# Altium PCB LEDArray8KeyBakup.PcbDoc
Units mil, origin at the board's own origin, x right, y up, seen from the top; angles counter-clockwise.
Board outline 6000 x 4000 mil, 2 copper layers (Top Layer, Bottom Layer); 27 components, 80 nets, 209 pads, 92 vias.
Unrouted connection lines stored in the file: 29.
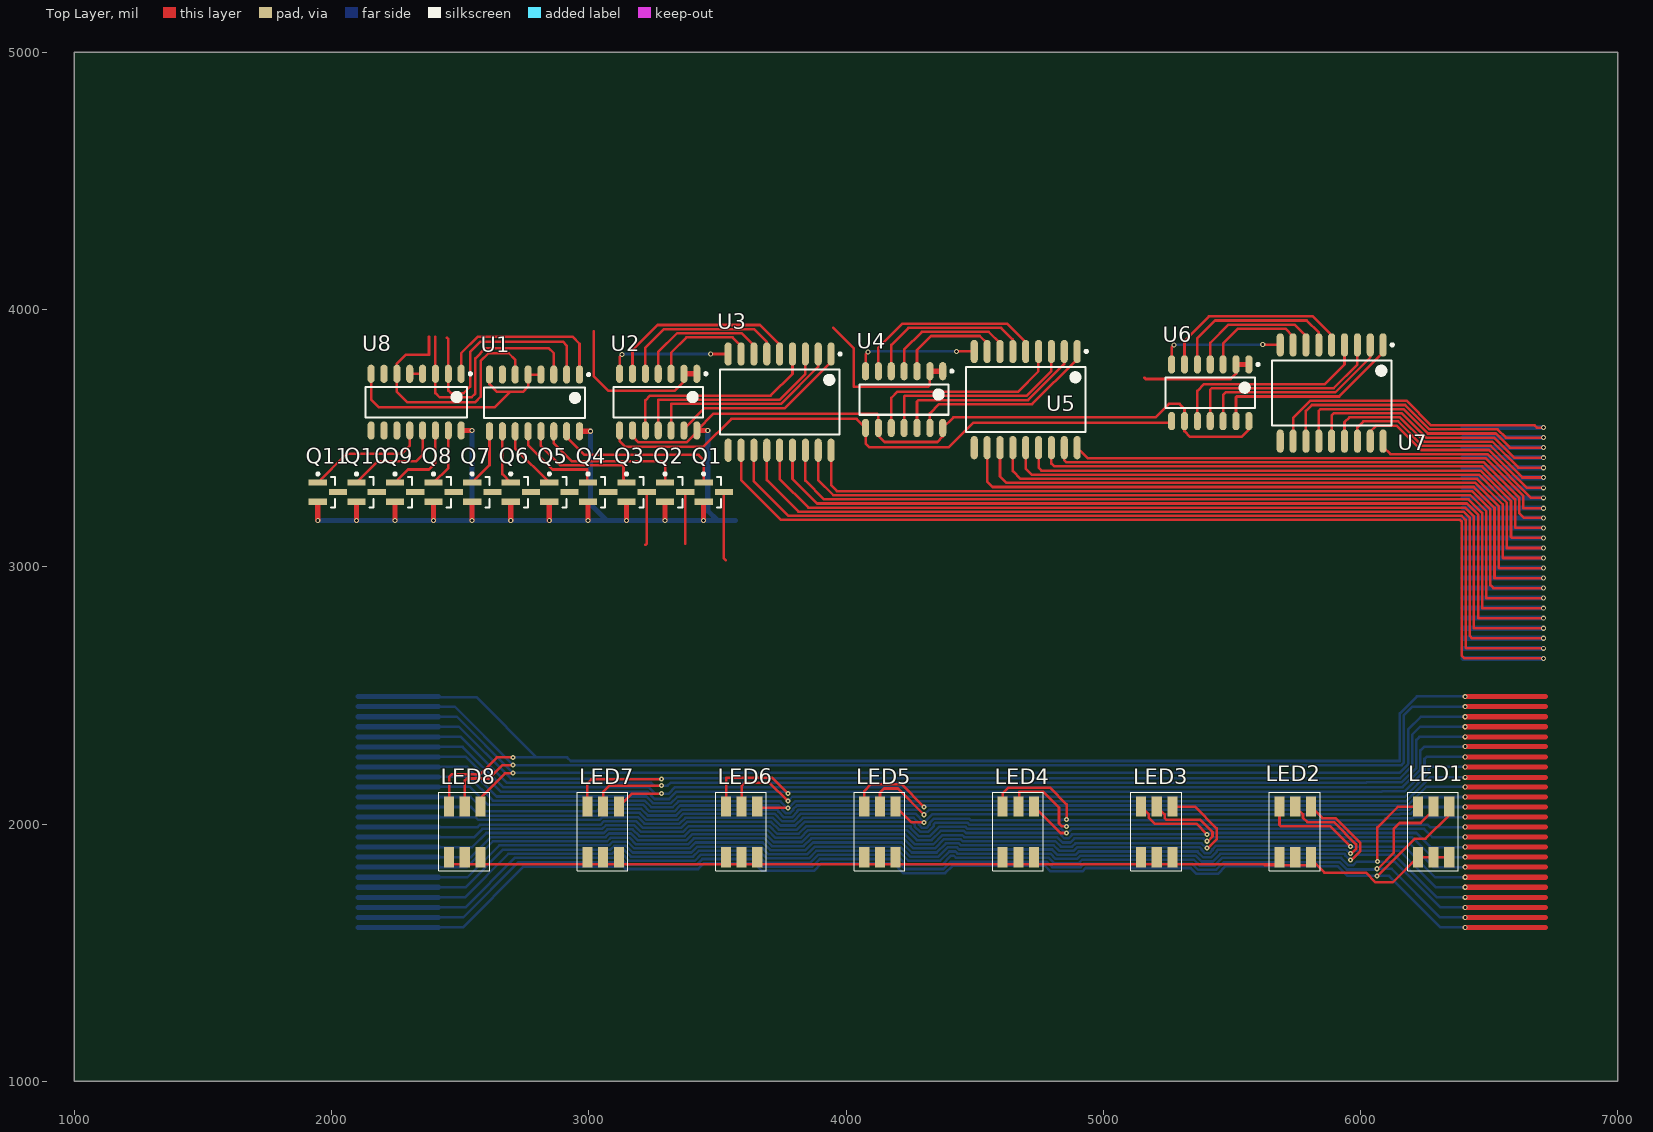
[diagram p0: Top Layer view]
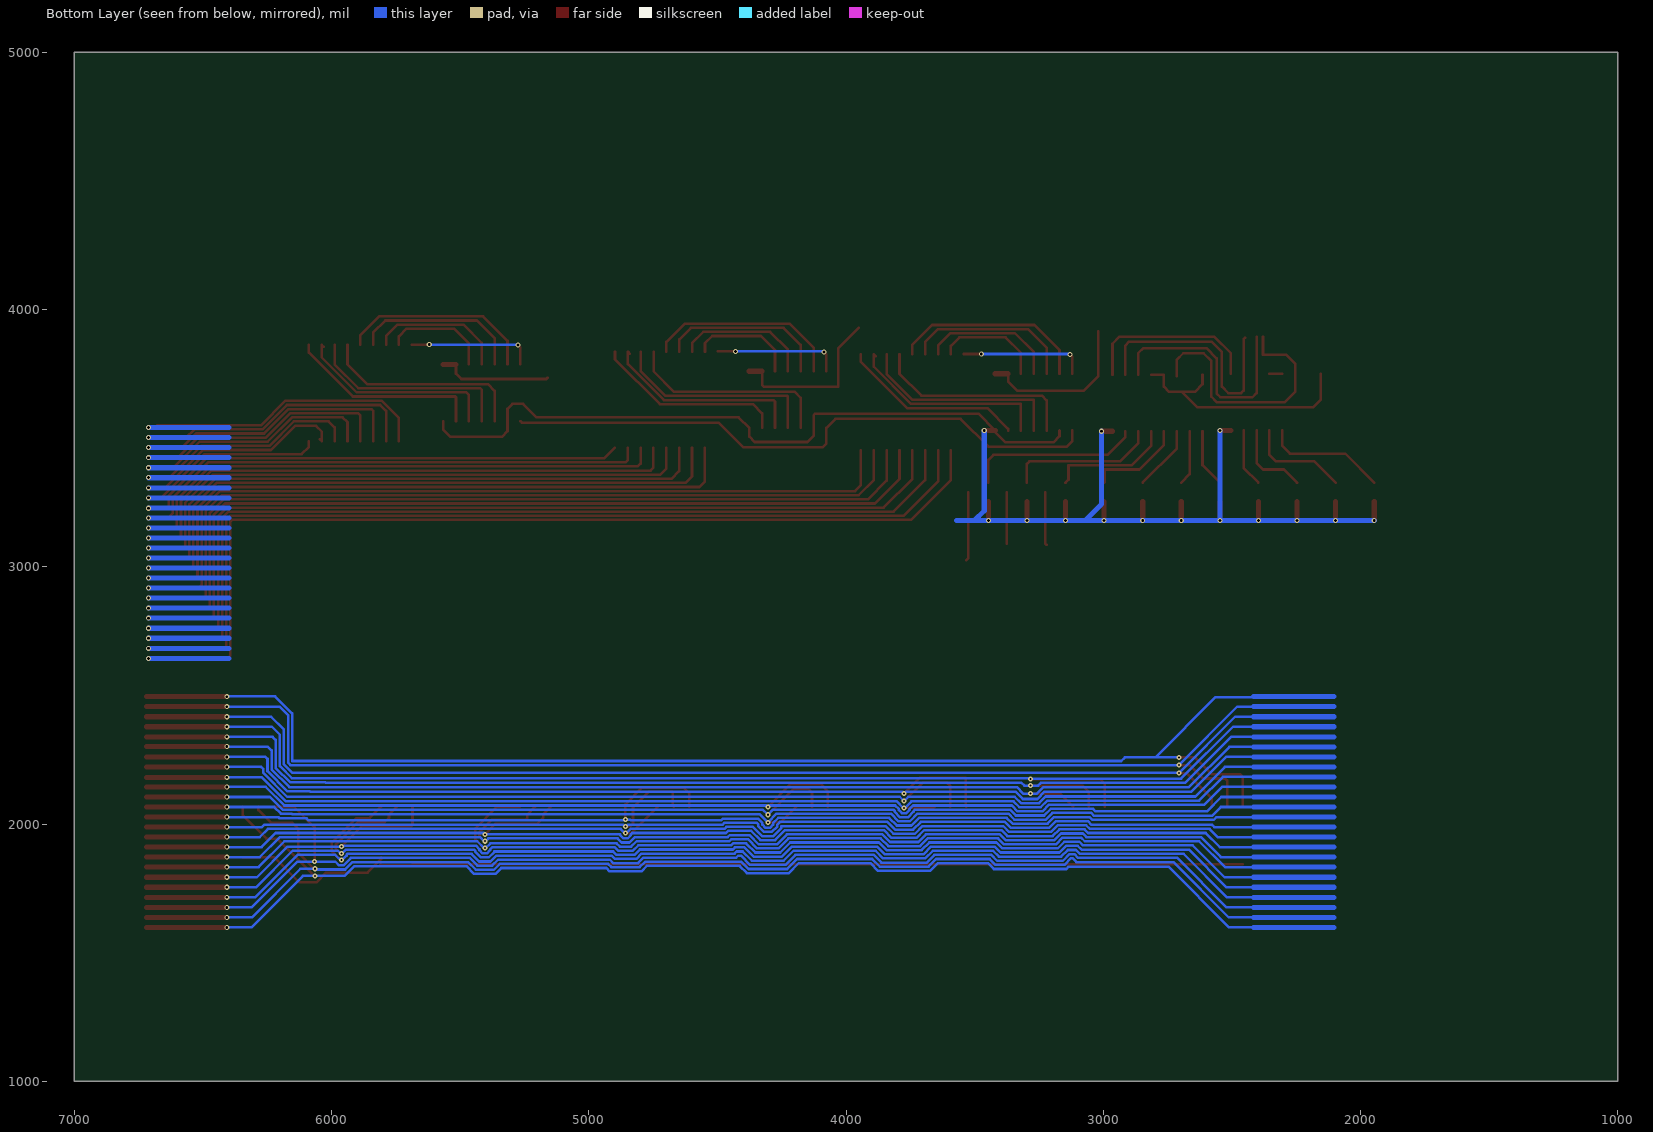
[diagram p1: Bottom Layer view, seen from below]

## Layer stack, top to bottom
Top Layer: signal copper 1.4
Dielectric: prepreg 12.6, FR-4, Dk 4.8
Bottom Layer: signal copper 1.4

## Board outline
1000,1000 7000,1000 7000,5000 1000,5000

## Design rules (kind name [scope] priority, off if disabled: settings)
Clearance [All] p1: gap=6
HoleSize [All] p1: absolutevalues=TRUE maxlimit=7.87 minlimit=7.87 maxpercent=80.000 minpercent=20.000
HoleToHoleClearance [All] p1: gap=3 allowstackedmicrovias=TRUE
MinimumAnnularRing [All] p1: minimumring=4
MinimumSolderMaskSliver [All] p1: minsoldermaskwidth=3.94
PolygonConnect [All] p1: connectstyle=Relief reliefconductorwidth=10 reliefentries=4 polygonreliefangle="90 Angle"
RoutingVias [All] p1: holewidth=11.02 width=19.68 viastyle="Through Hole" minholewidth=7.87 minwidth=19.68 maxholewidth=11.02 maxwidth=19.68
SilkscreenOverComponentPads [All] p1: minsilkscreentomaskgap=10
SolderMaskExpansion [All] p1: expansion=3
Width [All] p1: maxlimit=393.7 minlimit=5 preferedwidth=19.68 minimp=50.000000 maximp=50.000000 favimp=50.000000
24 further rules are at their usual default settings.

## Classes and differential pairs
component class LEDArray: Q1 Q2 Q3 Q4 Q5 Q6 Q7 Q8 Q9 Q10 Q11 U1 U2 U3 U4 U5 U6 U7 U8
component class 1: LED1 LED2 LED3 LED4 LED5 LED6 LED7 LED8

## Components (designator, comment, footprint, x,y, rotation, side; value= is the part's Value field where it differs from the comment)
LED1 "5050RGBLED" "5050 cRGBLED" 6284.34,1969.24 r90 top
LED2 "5050RGBLED" "5050 cRGBLED" 5746.27,1969.24 r90 top
LED3 "5050RGBLED" "5050 cRGBLED" 5208.2,1969.24 r90 top
LED4 "5050RGBLED" "5050 cRGBLED" 4670.13,1969.24 r90 top
LED5 "5050RGBLED" "5050 cRGBLED" 4132.06,1969.24 r90 top
LED6 "5050RGBLED" "5050 cRGBLED" 3593.99,1969.24 r90 top
LED7 "5050RGBLED" "5050 cRGBLED" 3055.92,1969.24 r90 top
LED8 "5050RGBLED" "5050 cRGBLED" 2517.85,1969.24 r90 top
Q1 "BC807" SOT23-3M 3485.99,3290 r0 top
Q2 "BC807" SOT23-3M 3335.99,3290 r0 top (schematic designator Q1)
Q3 "BC807" SOT23-3M 3185.99,3290 r0 top (schematic designator Q1)
Q4 "BC807" SOT23-3M 3035.99,3290 r0 top (schematic designator Q1)
Q5 "BC807" SOT23-3M 2885.99,3290 r0 top (schematic designator Q1)
Q6 "BC807" SOT23-3M 2735.99,3290 r0 top (schematic designator Q1)
Q7 "BC807" SOT23-3M 2585.99,3290 r0 top (schematic designator Q1)
Q8 "BC807" SOT23-3M 2435.99,3290 r0 top (schematic designator Q1)
Q9 "BC807" SOT23-3M 2285.99,3290 r0 top (schematic designator Q1)
Q10 "BC807" SOT23-3M 2135.99,3290 r0 top (schematic designator Q1)
Q11 "BC807" SOT23-3M 1985.99,3290 r0 top (schematic designator Q1)
U1 "SN54HC138M" SOIC127P602-16BM 2789,3637 r270 top
U2 "SN74HC164M" SOIC127P600-14AM 3270.01,3640 r270 top
U3 "ULN2803ADW" SOIC127P1030-18AM 3742,3640 r270 top
U4 "SN74HC164M" SOIC127P600-14AM 4226.01,3650 r270 top
U5 "ULN2803ADW" SOIC127P1030-18AM 4698.6,3650 r270 top
U6 "SN74HC164M" SOIC127P600-14AM 5416.01,3676.49 r270 top
U7 "ULN2803ADW" SOIC127P1030-18AM 5888,3675.49 r270 top
U8 "SN54HC138M" SOIC127P602-16BM 2329,3640 r270 top

## Footprints (in the part's own frame and the unit in brackets; to place one, negate y for a bottom-side part, rotate by r counter-clockwise, add the part's x,y. Pads: shape width x height; smd on the part's side, far side on the other; paste and mask are expansions set on the pad)
"5050 cRGBLED" [mm] "5050 RGBLED"
  rect 2x1 smd: 1(-2.5,1.55) 2(2.5,1.55) 3(-2.5,0) 4(2.5,0) 5(-2.5,-1.55) 6(2.5,-1.55)
  silkscreen extent -3.85,-2.45 3.9,2.55
SOIC127P600-14AM [mm] "SOIC, 14-Leads, Body 8.6x3.9mm, Pitch 1.27mm, IPC Low Density"
  oval 1.8x0.7 smd: 1(-2.8,3.81) 2(-2.8,2.54) 3(-2.8,1.27) 4(-2.8,0) 5(-2.8,-1.27) 6(-2.8,-2.54) 7(-2.8,-3.81) 8(2.8,-3.81) 9(2.8,-2.54) 10(2.8,-1.27) 11(2.8,0) 12(2.8,1.27) 13(2.8,2.54) 14(2.8,3.81)
  silkscreen extent -2.92,-4.4 1.5,4.84, body extent -2,-4.38 2,4.38, height 1.73
SOIC127P602-16BM [mm] "SOIC, 16-Leads, Body 9.9x3.9mm, Pitch 1.27mm, IPC Low Density"
  oval 1.8x0.7 smd: 1(-2.8,4.445) 2(-2.8,3.175) 3(-2.8,1.905) 4(-2.8,0.635) 5(-2.8,-0.635) 6(-2.8,-1.905) 7(-2.8,-3.175) 8(-2.8,-4.445) 9(2.8,-4.445) 10(2.8,-3.175) 11(2.8,-1.905) 12(2.8,-0.635) 13(2.8,0.635) 14(2.8,1.905) 15(2.8,3.175) 16(2.8,4.445)
  silkscreen extent -2.92,-5 1.5,5.47, body extent -2,-5 2,5, height 1.73
SOIC127P1030-18AM [mm] "SOIC, 18-Leads, Body 11.6x7.5mm, Pitch 1.27mm, IPC Low Density"
  oval 2.3x0.7 smd: 1(-4.75,5.08) 2(-4.75,3.81) 3(-4.75,2.54) 4(-4.75,1.27) 5(-4.75,0) 6(-4.75,-1.27) 7(-4.75,-2.54) 8(-4.75,-3.81) 9(-4.75,-5.08) 10(4.75,-5.08) 11(4.75,-3.81) 12(4.75,-2.54) 13(4.75,-1.27) 14(4.75,0) 15(4.75,1.27) 16(4.75,2.54) 17(4.75,3.81) 18(4.75,5.08)
  silkscreen extent -4.87,-5.9 3.2,6.11, body extent -3.8,-5.85 3.8,5.85, height 2.65
SOT23-3M [mm] "SOT23, 3-Leads, Body 2.9x1.3mm, Pitch 0.95mm, Lead Span 2.5mm, IPC Low Density"
  rect 1.8x0.6 smd: 1(-1,0.95) 2(-1,-0.95) 3(1,0)
  silkscreen extent -1.12,-1.5 0.7,1.92, body extent -0.7,-1.5 0.7,1.5, height 1.1

## Part data
LED1 LED2 LED3 LED4 LED5 LED6 LED7 LED8: "5050 RGB LED"
Q1 Q2 Q3 Q4 Q5 Q6 Q7 Q8 Q9 Q10 Q11: "PNP General Purpose Amplifier"
U1 U8: library part SN54HC138J, "3-Line to 8-Line Decoder / Demultiplexer"
U2 U4 U6: "8-Bit Parallel-Out Serial Shift Register"
U3 U5 U7: library part ULN2803A, "High-Voltage, High-Current Darlington Array"

## Via types
v1: diameter 19.68, hole 11.02, Top Layer to Bottom Layer, 68 vias
v2: diameter 19.68, hole 7.87, Top Layer to Bottom Layer, 24 vias

## Nets (pads, with @x,y where several pads share a name; then routed paths per layer and width w, separated by ;. In a path a pad name is that pad's centre, name@x,y a point inside that pad or via, vN(x,y) a via of type N, cw(c..) or ccw(c..) an arc to the next point about the centre after c; other vN are vias at no path point)
A: U1.1 U8.1 | length 698
  Top Layer w10: U8.1 2504,3830 2569,3895 2936,3895 2964,3867 U1.1
B: U1.2 U8.2 | length 952.1
  Top Layer w10: 2449,3890 2454,3885 U8.2 2454,3685 2464,3675 2514,3675 2539,3700 2539,3835 2579,3875 2899,3875 2914,3860 U1.2
C: U1.3 U8.3 | length 936.5
  Top Layer w10: 2404,3895 U8.3 2404,3675 2420,3659 2544,3659 2559,3674 2559,3810 2599,3850 2844,3850 2864,3830 U1.3
CLK: U2.8 U4.8 U6.8 | length 2363.4
  Top Layer w10: U2.8 3120.01,3488.99 3141.67,3467.33 3446.33,3467.33 3554,3575 4040.77,3575 U4.8 4076.01,3478.99 4090,3465 4400,3465 4495,3560 5259.75,3560 U6.8
COM1: LED1.1 LED1.3 LED1.5 LED2.1 LED2.3 LED2.5 LED3.1 LED3.3 LED3.5 LED4.1 LED4.3 LED4.5 LED5.1 LED5.3 LED5.5 LED6.1 LED6.3 LED6.5 LED7.1 LED7.3 LED7.5 LED8.1 LED8.3 LED8.5 Q1.3 | length 4307.4
  Top Layer w10: LED8.1@2457.82,1843.82 2578.87,1843.82 3532.96,1843.82 4193.08,1843.82 4670.13,1843.82 5147.18,1843.82 5624.02,1843.82 ; Q1.3 3525.36,3032.6 3532.96,3025 ; LED2.1@5686.25,1843.82 5624.02,1843.82 ; LED2.5@5807.29,1839.16 5628.68,1839.16 5624.02,1843.82 ; LED2.5 5807.29,1863.72 5860.02,1811 6021.02,1811 6059.02,1773 6125.5,1773 LED1.1 LED1.3 LED1.5 ; LED2.5@5808.29,1843.82 LED2.5@5809.96,1842.16
COM2: Q2.3 | length 200.2
  Top Layer w10: 3375,3090 3375.36,3090.36 Q2.3
COM3: Q3.3 | length 207.2
  Top Layer w10: 3220,3085 3225.36,3090.36 Q3.3
COM4: Q4.3
COM5: Q5.3
COM6: Q6.3
COM7: Q7.3
COM8: Q8.3
COM9: Q9.3
COM10: Q10.3
COM11: Q11.3
D: U1.6 U8.6 | length 1031
  Top Layer w10: 2379,3895 2379,3825 2289,3825 2254,3790 U8.6 2254,3680 2294,3640 2559,3640 2580,3661 2580,3800 2610,3830 2689,3830 2714,3805 U1.6 U1.6@2714,3740.54
GND: U1.4 U1.5 U1.8 U2.7 U3.9 U4.7 U5.9 U6.7 U7.9 U8.4 U8.5 U8.8 | length 2511.5
  Top Layer w10: U8.8 2154,3650 2184,3620 2634,3620 2694,3680 ; U8.5 U8.4 ; U1.8 2614,3710 2644,3680 2694,3680 ; U1.4 U1.5 2764,3700 2744,3680 2694,3680 ; U2.7 3120.01,3816.01 v1(3129,3825) ; v1(3474,3827.01) U3.9@3542.6,3827.01 ; U4.7 4076.01,3826.01 v1(4085,3835) ; v1(4430,3837.01) U5.9 ; U6.7 5266.01,3852.5 v1(5275,3861.49) ; v1(5620,3863.5) U7.9@5688.6,3863.5
  Bottom Layer w10: v1(3129,3825) 3131.01,3827.01 v1(3474,3827.01) ; v1(4085,3835) 4087.01,3837.01 v1(4430,3837.01) ; v1(5275,3861.49) 5277.01,3863.5 v1(5620,3863.5)
I1: U2.1 U2.2 | length 642.3
  Top Layer w10: 3020,3915 3020,3740.36 3075.36,3685 3335,3685 3370.01,3720.01 U2.2
  Top Layer w20: U2.2 U2.1
I2: U4.1 U4.2 | length 664.4
  Top Layer w10: 3951,3929 4030,3850 4030,3700 4320,3700 4326.01,3706.01 U4.2
  Top Layer w20: U4.2 U4.1
I3: U6.1 U6.2 | length 452.5
  Top Layer w10: 5160,3735 5165,3730 5495,3730 5516.01,3751.01 U6.2
  Top Layer w20: U6.2 U6.1
L1: LED1.6 U3.18 | length 9149.6
  Top Layer w10: U3.18 3942,3317 3965,3294 6433.53,3294 6505.14,3222.39 6505.14,2929 6517.14,2917 v1(6711,2917) ; v2(6065.02,1798) 6066.49,1798 6211.49,1943 6253.02,1943 6345.37,2035.35 LED1.6
  Top Layer w19.68: v1(6407.02,1598) 6719.78,1598
  Bottom Layer w10: 2279.34,1598 2415.21,1598 2511.02,1598 2747.02,1834 3134.83,1834 3143.67,1825.16 3425.47,1825.16 3448.31,1848 3642.76,1848 3672.6,1818.16 3875.44,1818.16 3905.28,1848 4183.64,1848 4222.48,1809.16 4385.55,1809.16 4413.4,1837 4774.52,1837 4795.37,1816.16 4918.67,1816.16 4931.51,1829 5339.41,1829 5362.25,1806.16 5445.79,1806.16 5475.63,1836 5911.29,1836 5949.29,1798 v2(6065.02,1798) 6111.02,1798 6311.02,1598 v1(6407.02,1598) ; 6578.42,2917 v1(6711,2917)
  Bottom Layer w19.68: 2102.45,1598 2415.21,1598 ; 6398.25,2917 v1(6711,2917)
L2: LED1.4 U3.17 | length 9378.8
  Top Layer w10: U3.17 3892,3337 3951,3278 6426.9,3278 6489.14,3215.76 6489.14,2878 v1(6711,2878) ; v2(6065.02,1826) 6067.49,1826 6129.02,1887.52 6129.02,1981 6152.02,2004 6234.26,2004 6284.34,2054.08 LED1.4
  Top Layer w19.68: v1(6407.02,1637) 6719.78,1637
  Bottom Layer w10: 2102.45,1637 2415.21,1637 2512.02,1637 2727.02,1852 3104,1852 3119,1867 3124.45,1867 3150.3,1841.16 3418.84,1841.16 3441.68,1864 3649.39,1864 3679.23,1834.16 3868.81,1834.16 3898.65,1864 4190.27,1864 4229.11,1825.16 4378.93,1825.16 4406.77,1853 4781.15,1853 4801.99,1832.16 4912.04,1832.16 4924.89,1845 5346.03,1845 5368.88,1822.16 5439.16,1822.16 5469,1852 5917.92,1852 5946.76,1823.16 6062.18,1823.16 v2(6065.02,1826) 6121.02,1826 6310.02,1637 v1(6407.02,1637) ; 6575.14,2878 v1(6711,2878)
  Bottom Layer w19.68: 2102.45,1637 2415.21,1637 ; 6398.25,2878 v1(6711,2878)
L3: LED1.2 U3.16 | length 9581.1
  Top Layer w10: U3.16 3842,3335 3915,3262 6420.27,3262 6473.14,3209.14 6473.14,2839 v1(6711,2839) ; v2(6066.02,1854) 6066.02,1987 6146.02,2067 6222.65,2067 LED1.2
  Top Layer w19.68: v1(6407.02,1676) 6719.78,1676
  Bottom Layer w10: 2102.45,1676 2415.21,1676 2520.02,1676 2712.02,1868 3097.37,1868 3112.37,1883 3131.08,1883 3156.92,1857.16 3412.22,1857.16 3435.06,1880 3656.01,1880 3685.86,1850.16 3862.18,1850.16 3892.02,1880 4196.9,1880 4235.74,1841.16 4372.3,1841.16 4408.14,1877 4418.65,1877 4426.65,1869 4787.78,1869 4808.62,1848.16 4905.42,1848.16 4918.26,1861 5352.66,1861 5375.5,1838.16 5432.53,1838.16 5462.38,1868 5924.54,1868 5953.39,1839.16 5970.65,1839.16 5985.49,1854 v2(6066.02,1854) 6133.02,1854 6311.02,1676 v1(6407.02,1676) ; 6398.25,2839 v1(6711,2839)
  Bottom Layer w19.68: 2102.45,1676 2415.21,1676 ; 6398.25,2839 v1(6711,2839)
L4: LED2.6 U3.15 | length 9659.8
  Top Layer w10: U3.15 3792,3342 3888,3246 6413.65,3246 6457.14,3202.51 6457.14,2800 v1(6711,2800) ; LED2.6 5851.96,2023 5903.12,2023 5998.86,1927.26 5998.86,1893.37 5965.49,1860 v2(5962.02,1860)
  Top Layer w19.68: v1(6407.02,1715) 6719.78,1715
  Bottom Layer w10: 2102.45,1715 2415.21,1715 2518.02,1715 2687.02,1884 3090.75,1884 3105.75,1899 3137.71,1899 3163.55,1873.16 3405.59,1873.16 3428.43,1896 3662.64,1896 3692.48,1866.16 3855.55,1866.16 3885.4,1896 4203.52,1896 4242.37,1857.16 4365.67,1857.16 4401.51,1893 4425.28,1893 4433.28,1885 4794.41,1885 4815.25,1864.16 4898.79,1864.16 4911.63,1877 5359.29,1877 5382.13,1854.16 5425.91,1854.16 5455.75,1884 5937.92,1884 5941.18,1880.74 5941.18,1877.37 5958.54,1860 v2(5962.02,1860) 5965.49,1860 5985.49,1880 6132.02,1880 6297.02,1715 v1(6407.02,1715) ; 6398.25,2800 v1(6711,2800)
  Bottom Layer w19.68: 2102.45,1715 2415.21,1715 ; 6398.25,2800 v1(6711,2800)
L5: LED2.4 U3.14 | length 9734.8
  Top Layer w10: U3.14 3742,3342 3854,3230 6407.02,3230 6441.14,3195.88 6441.14,2761 v1(6711,2761) ; LED2.4 5776.61,2037.33 5776.61,2023.74 5793.35,2007 5896.49,2007 5982.86,1920.63 5982.86,1903.37 5965.49,1886 v2(5962.02,1886)
  Top Layer w19.68: v1(6407.02,1754) 6719.78,1754
  Bottom Layer w10: 2102.45,1754 2415.21,1754 2521.02,1754 2667.02,1900 3084.12,1900 3099.12,1915 3144.34,1915 3170.18,1889.16 3398.96,1889.16 3421.8,1912 3669.27,1912 3699.11,1882.16 3848.93,1882.16 3878.77,1912 4210.15,1912 4248.99,1873.16 4359.04,1873.16 4394.89,1909 4431.91,1909 4439.91,1901 4801.03,1901 4821.88,1880.16 4892.16,1880.16 4905,1893 5367.18,1893 5367.18,1891.74 5388.76,1870.16 5419.28,1870.16 5440.86,1891.74 5440.86,1895.11 5445.75,1900 5944.54,1900 5958.54,1886 v2(5962.02,1886) 5965.49,1886 5975.49,1896 6151.02,1896 6293.02,1754 v1(6407.02,1754) ; 6398.25,2761 v1(6711,2761)
  Bottom Layer w19.68: 2102.45,1754 2415.21,1754 ; 6398.25,2761 v1(6711,2761)
L6: LED2.2 U3.13 | length 9823.5
  Top Layer w10: U3.13 3692,3337 3815,3214 6400.39,3214 6425.14,3189.25 6425.14,2731 6434.14,2722 v1(6711,2722) ; LED2.2 5685.25,1996.77 5691.02,1991 5883.02,1991 v2(5962.02,1912)
  Top Layer w19.68: v1(6407.02,1793) 6719.78,1793
  Bottom Layer w10: 2102.45,1793 2415.21,1793 2528.02,1793 2652.02,1917 3078.49,1917 3092.49,1931 3150.96,1931 3176.81,1905.16 3392.33,1905.16 3415.18,1928 3675.9,1928 3705.74,1898.16 3842.3,1898.16 3872.14,1928 4216.78,1928 4255.62,1889.16 4352.42,1889.16 4388.26,1925 4438.53,1925 4446.53,1917 4807.66,1917 4828.5,1896.16 4885.53,1896.16 4898.38,1909 5375.92,1909 5383.18,1901.74 5383.18,1898.37 5395.39,1886.16 5412.65,1886.16 5424.86,1898.37 5424.86,1901.74 5439.12,1916 5951.17,1916 5955.17,1912 v2(5962.02,1912) 6171.02,1912 6290.02,1793 v1(6407.02,1793) ; 6398.25,2722 v1(6711,2722)
  Bottom Layer w19.68: 2102.45,1793 2415.21,1793 ; 6398.25,2722 v1(6711,2722)
L7: LED3.6 U3.12 | length 9625.1
  Top Layer w10: U3.12 3642,3332 3776,3198 6393.76,3198 6409.14,3182.63 6409.14,2686 ; LED3.6 5356.35,2067.67 5440.86,1983.16 5440.86,1940.37 5407.49,1907 v2(5404.02,1907) ; 6412.14,2683 v1(6711,2683)
  Top Layer w19.68: v1(6407.02,1832) 6719.78,1832
  Bottom Layer w10: 2279.34,1832 2415.21,1832 2526.02,1832 2627.02,1933 3071.86,1933 3085.86,1947 3157.59,1947 3183.43,1921.16 3385.71,1921.16 3408.55,1944 3682.52,1944 3712.37,1914.16 3835.67,1914.16 3865.51,1944 4223.41,1944 4262.25,1905.16 4345.79,1905.16 4381.63,1941 4445.16,1941 4453.16,1933 4814.29,1933 4835.13,1912.16 4878.91,1912.16 4891.75,1925 5382.54,1925 5400.54,1907 v2(5404.02,1907) 5407.49,1907 5433.49,1933 6183.02,1933 6284.02,1832 v1(6407.02,1832) ; 6398.25,2683 v1(6711,2683)
  Bottom Layer w19.68: 2102.45,1832 2415.21,1832 ; 6398.25,2683 v1(6711,2683)
L8: LED3.4 U3.11 | length 9513.6
  Top Layer w10: U3.11 3592,3337 3747,3182 6387.14,3182 6393.14,3176 6393.14,2678.11 ; LED3.4 5238.54,2037.33 5238.54,2023.74 5244.98,2017.3 5376.72,2017.3 5376.72,2016.78 5424.86,1968.63 5424.86,1951.37 5406.49,1933 v2(5404.02,1933) ; 6393.09,2678.11 6393.09,2654.68 6403.76,2644 v1(6711,2644)
  Top Layer w19.68: v1(6407.02,1871) 6719.78,1871
  Bottom Layer w10: 2282.63,1871 2415.21,1871 2542.39,1871 2620.39,1949 3065.24,1949 3079.24,1963 3164.22,1963 3190.06,1937.16 3379.08,1937.16 3401.92,1960 3689.15,1960 3718.99,1930.16 3829.04,1930.16 3858.89,1960 4230.03,1960 4268.88,1921.16 4339.16,1921.16 4375,1957 4451.79,1957 4459.79,1949 4820.92,1949 4841.76,1928.16 4872.28,1928.16 4888.12,1944 5390.54,1944 5401.54,1933 v2(5404.02,1933) 5406.49,1933 5422.49,1949 6201.02,1949 6279.02,1871 v1(6407.02,1871) ; 6575.14,2644 v1(6711,2644)
  Bottom Layer w19.68: 2102.45,1871 2415.21,1871 ; 6398.25,2644 v1(6711,2644)
L9: LED3.2 U5.18 | length 7954.7
  Top Layer w10: U5.18 4939.59,3422 6486.55,3422 6633.14,3275.41 6633.14,3227.49 v1(6711,3227.49) ; LED3.2 5177.51,2037.33 5177.51,2023.74 5199.96,2001.3 5362.72,2001.3 v2(5404.02,1960)
  Top Layer w19.68: v1(6407.02,1910) 6719.78,1910
  Bottom Layer w10: 2102.45,1910 2415.21,1910 2547.02,1910 2602.02,1965 3058.61,1965 3072.61,1979 3170.85,1979 3196.69,1953.16 3372.45,1953.16 3395.29,1976 3695.78,1976 3725.62,1946.16 3822.42,1946.16 3852.26,1976 4236.66,1976 4275.5,1937.16 4332.53,1937.16 4368.38,1973 4458.42,1973 4466.42,1965 4830.92,1965 4836.18,1959.74 4836.18,1956.37 4848.39,1944.16 4865.65,1944.16 4877.86,1956.37 4877.86,1959.74 4878.12,1960 v2(5404.02,1960) 5409.02,1965 6217.02,1965 6272.02,1910 v1(6407.02,1910) ; 6398.25,3229 v1@6711,3229
  Bottom Layer w19.68: 2102.45,1910 2415.21,1910 ; 6398.25,3229 v1@6711,3229
L10: LED4.6 U5.17 | length 7892
  Top Layer w10: LED4.6 4833.82,1965 v2(4857.02,1965) ; U5.17 4848.6,3413.92 4856.52,3406 6479.92,3406 6617.14,3268.78 6617.14,3208.98 6636.11,3190 v1(6711,3190)
  Top Layer w19.68: v1(6407.02,1949) 6719.78,1949
  Bottom Layer w10: 2102.45,1949 2415.21,1949 2555.02,1949 2587.02,1981 3051.98,1981 3065.98,1995 3177.47,1995 3203.32,1969.16 3365.82,1969.16 3388.67,1992 3702.41,1992 3732.25,1962.16 3815.79,1962.16 3845.63,1992 4250.14,1992 4251.18,1990.96 4251.18,1984.11 4282.13,1953.16 4325.91,1953.16 4361.75,1989 4465.04,1989 4473.04,1981 4837.54,1981 4853.54,1965 v2(4857.02,1965) 4860.49,1965 4876.49,1981 6247.02,1981 6279.02,1949 v1(6407.02,1949) ; 6398.25,3190 v1(6711,3190)
  Bottom Layer w19.68: 2102.45,1949 2415.21,1949 ; 6398.25,3190 v1(6711,3190)
L11: LED4.4 U5.16 | length 8137.6
  Top Layer w10: LED4.4 4674.02,2071.56 4674.02,2125 4767.02,2125 4828.02,2064 4828.02,2002 4839.02,1991 v2(4857.02,1991) ; U5.16 4798.6,3401.4 4810,3390 6473.29,3390 6601.14,3262.16 6601.14,3151 v1(6711,3151)
  Top Layer w19.68: v1(6407.02,1988) 6719.78,1988
  Bottom Layer w10: 2102.45,1988 2415.21,1988 2568.02,1988 2577.02,1997 3045.35,1997 3059.35,2011 3184.1,2011 3209.94,1985.16 3359.2,1985.16 3382.04,2008 3709.03,2008 3738.88,1978.16 3809.16,1978.16 3839,2008 4256.76,2008 4267.18,1997.59 4267.18,1990.74 4288.76,1969.16 4319.28,1969.16 4340.86,1990.74 4340.86,1997.59 4348.27,2005 4471.67,2005 4479.67,1997 4847.54,1997 4853.54,1991 v2(4857.02,1991) 4860.49,1991 4866.49,1997 6262.02,1997 6271.02,1988 v1(6407.02,1988) ; 6398.25,3151 v1(6711,3151)
  Bottom Layer w19.68: 2102.45,1988 2415.21,1988 ; 6398.25,3151 v1(6711,3151)
L12: LED4.2 U5.15 | length 8289.7
  Top Layer w10: LED4.2 4609.11,2118.09 4632.02,2141 4793.02,2141 4858.02,2076 4858.02,2018 v2(4857.02,2017) ; U5.15 4748.6,3385 4759.6,3374 6466.67,3374 6585.14,3255.53 6585.14,3116 6589.14,3112 v1(6711,3112)
  Top Layer w19.68: v1(6407.02,2027) 6719.78,2027
  Bottom Layer w10: 2102.45,2027 2415.21,2027 2559.39,2027 2570.39,2016 3041.73,2016 3052.73,2027 3190.73,2027 3216.57,2001.16 3352.57,2001.16 3375.41,2024 3715.66,2024 3745.5,1994.16 3802.53,1994.16 3832.38,2024 4263.39,2024 4283.18,2004.22 4283.18,1997.37 4295.39,1985.16 4312.65,1985.16 4324.86,1997.37 4324.86,2004.22 4341.65,2021 4478.3,2021 4485.3,2014 4836.12,2014 4839.12,2017 v2(4857.02,2017) 4860.02,2014 6089.02,2014 6097.02,2022 6201.55,2022 6206.55,2027 v1(6407.02,2027) ; 6398.25,3112 v1(6711,3112)
  Bottom Layer w19.68: 2102.45,2027 2415.21,2027 ; 6398.25,3112 v1(6711,3112)
L13: LED5.6 U5.14 | length 8119.3
  Top Layer w10: LED5.6 4254.75,2006 v2(4304.02,2006) ; U5.14 4698.6,3381.4 4722,3358 6460.04,3358 6569.14,3248.9 6569.14,3073 v1(6711,3073)
  Top Layer w19.68: v1(6407.02,2066) 6719.78,2066
  Bottom Layer w10: 2102.45,2066 2415.21,2066 2543.02,2066 2577.02,2032 3035.1,2032 3046.1,2043 3197.36,2043 3223.2,2017.16 3345.94,2017.16 3368.78,2040 3722.29,2040 3752.13,2010.16 3795.91,2010.16 3825.75,2040 4270.02,2040 v2(4304.02,2006) 4336.02,2038 6153.02,2038 6155.02,2040 6196.92,2040 6222.92,2066 v1(6407.02,2066) ; 6398.25,3073 v1(6711,3073)
  Bottom Layer w19.68: 2102.45,2066 2415.21,2066 ; 6398.25,3073 v1(6711,3073)
L14: LED5.4 U5.13 | length 8358.3
  Top Layer w10: LED5.4 4132.06,2122.04 4148.02,2138 4202.02,2138 v2(4304.02,2036) ; U5.13 4648.6,3371.4 4678,3342 6453.41,3342 6553.14,3242.27 6553.14,3036 6555.14,3034 v1(6711,3034)
  Top Layer w19.68: v1(6407.02,2105) 6719.78,2105
  Bottom Layer w10: 2102.45,2105 2415.21,2105 2541.18,2105 2597.02,2049.16 3029.63,2049.16 3039.47,2059 3203.98,2059 3229.83,2033.16 3339.31,2033.16 3362.16,2056 3732.29,2056 3737.18,2051.11 3737.18,2047.74 3758.76,2026.16 3789.28,2026.16 3810.86,2047.74 3810.86,2051.11 3815.75,2056 4284.02,2056 v2(4304.02,2036) 4324.02,2056 6190.29,2056 6239.29,2105 v1(6407.02,2105) ; 6398.25,3034 v1(6711,3034)
  Bottom Layer w19.68: 2102.45,2105 2415.21,2105 ; 6398.25,3034 v1(6711,3034)
L15: LED5.2 U5.12 | length 8520.6
  Top Layer w10: LED5.2 4071.03,2128.02 4098.02,2155 4215.02,2155 v2(4304.02,2066) ; U5.12 4598.6,3351.4 4624,3326 6446.78,3326 6537.14,3235.65 6537.14,2997 6539.14,2995 v1(6711,2995)
  Top Layer w19.68: v1(6407.02,2144) 6719.78,2144
  Bottom Layer w10: 2102.45,2144 2415.21,2144 2538.02,2144 2607.02,2075 3210.61,2075 3236.45,2049.16 3332.69,2049.16 3355.53,2072 3738.92,2072 3753.18,2057.74 3753.18,2054.37 3765.39,2042.16 3782.65,2042.16 3794.86,2054.37 3794.86,2057.74 3809.12,2072 4298.02,2072 v2(4304.02,2066) 4310.02,2072 6183.67,2072 6255.67,2144 v1(6407.02,2144) ; 6398.25,2995 v1(6711,2995)
  Bottom Layer w19.68: 2102.45,2144 2415.21,2144 ; 6398.25,2995 v1(6711,2995)
L16: LED6.6 U5.11 | length 8403.7
  Top Layer w10: LED6.6 3659.68,2063 v2(3774.02,2063) ; U5.11 4548.6,3331.4 4570,3310 6440.16,3310 6521.14,3229.02 6521.14,2956 v1(6711,2956)
  Top Layer w19.68: v1(6407.02,2181.49) 6719.78,2181.49
  Bottom Layer w10: 2102.45,2183 2415.21,2183 2535.02,2183 2627.02,2091 3217.24,2091 3243.08,2065.16 3326.06,2065.16 3348.9,2088 3745.54,2088 3770.54,2063 v2(3774.02,2063) 3777.49,2063 3802.49,2088 6177.04,2088 6270.53,2181.49 v1(6407.02,2181.49) ; 6398.25,2956 v1(6711,2956)
  Bottom Layer w19.68: 2102.45,2183 2415.21,2183 ; 6398.25,2956 v1(6711,2956)
L17: LED6.4 U7.18 | length 6716.4
  Top Layer w10: LED6.4 3593.99,2146.97 3607.02,2160 3703.02,2160 v2(3774.02,2089) ; U7.18 6088,3466 6116,3438 6493.18,3438 6663.18,3268 v1(6711,3268)
  Top Layer w19.68: v1(6407.02,2222) 6719.78,2222
  Bottom Layer w10: 2102.45,2222 2415.21,2222 2527.02,2222 2642.02,2107 3223.86,2107 3249.71,2081.16 3319.43,2081.16 3344.27,2106 3757.02,2106 v2(3774.02,2089) 3791.02,2106 6172.41,2106 6265.02,2198.61 6265.02,2213 6274.02,2222 v1(6407.02,2222) ; 6398.25,3268 v1(6711,3268)
  Bottom Layer w19.68: 2102.45,2222 2415.21,2222 ; 6398.25,3268 v1(6711,3268)
L18: LED6.2 U7.17 | length 6931.8
  Top Layer w10: LED6.2 3534.02,2068.73 3534.02,2180 3713.02,2180 v2(3774.02,2119) ; U7.17@6045,3495.48 U7.17 6038,3525.49 6060,3547.49 6141.75,3547.49 6235.24,3454 6499.8,3454 6646.8,3307 v1(6711,3307)
  Top Layer w19.68: v1(6407.02,2261) 6719.78,2261
  Bottom Layer w10: 2102.45,2261 2415.21,2261 2522.02,2261 2657.02,2126 3227.49,2126 3256.33,2097.16 3312.8,2097.16 3341.65,2126 3767.02,2126 v2(3774.02,2119) 3781.02,2126 6083.02,2126 6084.02,2127 6170.78,2127 6249.02,2205.24 6249.02,2253 6257.02,2261 v1(6407.02,2261) ; 6398.25,3307 v1(6711,3307)
  Bottom Layer w19.68: 2102.45,2261 2415.21,2261 ; 6398.25,3307 v1(6711,3307)
L19: LED7.6 U7.16 | length 6812.2
  Top Layer w10: LED7.6 3167.27,2118 v2(3282.02,2118) ; U7.16 5988,3541.49 6011.51,3565 6146.86,3565 6241.86,3470 6506.43,3470 6629.43,3347 v1(6711,3347)
  Top Layer w19.68: v1(6407.02,2301) 6719.78,2301
  Bottom Layer w10: 2102.45,2300 2415.21,2300 2510.02,2300 2667.02,2143 3233.12,2143 3258.12,2118 v2(3282.02,2118) 3311.02,2118 3336.02,2143 6164.16,2143 6233.02,2211.86 6233.02,2286 6248.02,2301 v1(6407.02,2301) ; 6398.25,3346 v1@6711,3346
  Bottom Layer w19.68: 2102.45,2300 2415.21,2300 ; 6398.25,3346 v1@6711,3346
L20: LED7.4 U7.15 | length 6651.4
  Top Layer w10: LED7.4 3055.92,2123.9 3081.02,2149 v2(3282.02,2149) ; U7.15 5938,3562.49 5956.51,3581 6153.49,3581 6248.49,3486 6513.06,3486 6614.06,3385 v1(6711,3385)
  Top Layer w19.68: v1(6407.02,2339) 6719.78,2339
  Bottom Layer w10: 2279.34,2339 2415.21,2339 2503.02,2339 2682.02,2160 3242.12,2160 3253.12,2149 v2(3282.02,2149) 3306.91,2149 3318.91,2161 6023.02,2161 6023.86,2161.84 6160.37,2161.84 6217.02,2218.49 6217.02,2327 6229.02,2339 v1(6407.02,2339) ; 6575.14,3385 v1(6711,3385)
  Bottom Layer w19.68: 2102.45,2339 2415.21,2339 ; 6398.25,3385 v1(6711,3385)
L21: LED7.2 U7.14 | length 7179.2
  Top Layer w10: 2994.02,2159 2994.89,2158.13 ; LED7.2 2994.89,2158.13 ; v2(3282.02,2175) 3280.59,2173.57 3010.33,2173.57 2994.89,2158.13 ; U7.14 5888,3588.49 5896.51,3597 6160.12,3597 6255.12,3502 6519.69,3502 6597.69,3424 v1(6711,3424)
  Top Layer w19.68: v1(6407.02,2378) 6719.78,2378
  Bottom Layer w10: 2102.45,2378 2415.21,2378 2495.02,2378 2697.02,2176 3281.02,2176 v2(3282.02,2175) 3284.86,2177.84 6153.74,2177.84 6201.02,2225.12 6201.02,2347 6232.02,2378 v1(6407.02,2378) ; 6398.25,3424 v1(6711,3424)
  Bottom Layer w19.68: 2102.45,2378 2415.21,2378 ; 6398.25,3424 v1(6711,3424)
L22: LED8.6 U7.13 | length 6719.5
  Top Layer w10: LED8.6 2578.87,2101.85 2674.02,2197 2705.02,2197 v2(2706.02,2198) ; U7.13 5838,3606.49 5844.51,3613 6166.75,3613 6261.75,3518 6526.31,3518 6581.31,3463 v1(6711,3463)
  Top Layer w19.68: v1(6407.02,2417) 6719.78,2417
  Bottom Layer w10: 2279.34,2417 2415.21,2417 2487.02,2417 v2(2706.02,2198) 2707.02,2199 6152.27,2199 6185.02,2231.75 6185.02,2367 6235.02,2417 v1(6407.02,2417) ; 6575.14,3463 v1(6711,3463)
  Bottom Layer w19.68: 2102.45,2417 2415.21,2417 ; 6398.25,3463 v1(6711,3463)
L23: LED8.4 U7.12 | length 7268.8
  Top Layer w10: LED8.4 2518.02,2067.84 2518.02,2169 2526.02,2177 2612.02,2177 2664.02,2229 v2(2706.02,2229) ; U7.12 5788,3605.86 5811.14,3629 6173.37,3629 6268.37,3534 6532.94,3534 6564.94,3502 v1(6711,3502)
  Top Layer w19.68: v1(6407.02,2456) 6719.78,2456
  Bottom Layer w10: 2102.45,2456 2415.21,2456 2479.02,2456 v2(2706.02,2229) 6159.65,2229 6169.02,2238.37 6169.02,2423.37 6201.65,2456 v1(6407.02,2456) ; 6398.25,3502 v1(6711,3502)
  Bottom Layer w19.68: 2102.45,2456 2415.21,2456 ; 6398.25,3502 v1(6711,3502)
L24: LED8.2 U7.11 | length 7051.9
  Top Layer w10: LED8.2 2456.82,2182.8 2467.02,2193 2577.05,2193 2643.05,2259 v2(2706.02,2259) ; U7.11 5738,3578.49 5804.51,3645 6180,3645 6275,3550 6677.11,3550 6686.11,3541 v1(6711,3541)
  Top Layer w19.68: v1(6407.02,2495) 6719.78,2495
  Bottom Layer w10: 2227.97,2493 2563.02,2493 2797.02,2259 ; v2(2706.02,2259) 2797.02,2259 ; v1@6406.02,2496 6219.02,2496 6153.02,2430 6153.02,2245 2930.02,2245 2916.02,2259 2797.02,2259
  Bottom Layer w19.68: 2102.45,2495 2415.21,2495 ; 6398.25,3541 v1(6711,3541)
NetQ1_1: Q1.1 U1.15 | length 679.3
  Top Layer w10: U1.15 2914,3505 2984,3435 3426.62,3435 3446.62,3415 Q1.1
NetQ2_1: Q2.1 U1.14 | length 585.3
  Top Layer w10: U1.14 2864,3480 2934,3410 3287.01,3410 3296.62,3400.39 Q2.1
NetQ3_1: Q3.1 U1.13 | length 480.7
  Top Layer w10: U1.13 2814,3470 2890,3394 3135.02,3394 3135.02,3339 Q3.1
NetQ4_1: Q4.1 U1.12 | length 374.8
  Top Layer w10: U1.12 2764,3472.99 2858.99,3378 2994,3378 2994,3330.02 Q4.1
NetQ5_1: Q5.1 U1.11 | length 254.3
  Top Layer w10: U1.11 2714,3460.02 Q5.1
NetQ6_1: Q6.1 U1.10 | length 212.9
  Top Layer w10: U1.10 2664,3360.02 Q6.1
NetQ7_1: Q7.1 U1.9 | length 227.3
  Top Layer w10: Q7.1 2614,3394.78 U1.9
NetQ8_1: Q8.1 U8.15 | length 226.1
  Top Layer w10: Q8.1 2454,3384.78 U8.15
NetQ9_1: Q9.1 U8.14 | length 315.5
  Top Layer w10: Q9.1 2297.22,3378 2379,3378 2404,3403 U8.14
NetQ10_1: Q10.1 U8.13 | length 396.7
  Top Layer w10: Q10.1 2179.22,3410 2329,3410 2354,3435 U8.13
NetQ11_1: Q11.1 U8.12 | length 476.2
  Top Layer w10: Q11.1 2059.22,3440 2274,3440 2304,3470 U8.12
NetU2_3: U2.3 U3.8 | length 425.3
  Top Layer w10: U2.3 3320.01,3832 3380.01,3892 3559,3892 3592,3859 U3.8@3592,3826.01
NetU2_4: U2.4 U3.7 | length 540.3
  Top Layer w10: U2.4 3270.01,3834.01 3344,3908 3594,3908 3642,3860 U3.7@3642,3826.01
NetU2_5: U2.5 U3.6 | length 672.3
  Top Layer w10: U2.5 3220.01,3852 3292.01,3924 3642,3924 3692,3874 U3.6@3692,3826.01
NetU2_6: U2.6 U3.5 | length 773.7
  Top Layer w10: U2.6 3170.01,3842 3268.01,3940 3665.76,3940 3742,3863.76 U3.5@3742,3826.01
NetU2_10: U2.10 U3.4 | length 807.9
  Top Layer w10: U2.10 3220.01,3647 3238.01,3665 3707,3665 3792,3750 U3.4@3792,3826.01
NetU2_11: U2.11 U3.3 | length 808.9
  Top Layer w10: U2.11 3270.01,3649 3740.76,3649 3842,3750.24 U3.3@3842,3826.01
NetU2_12: U2.12 U3.2 | length 794.3
  Top Layer w10: U2.12 3320.01,3632 3321.01,3633 3747.39,3633 3892,3777.61 3892,3826.01 U3.2@3884,3818.01
NetU2_13: U2.13 U3.1 | length 716
  Top Layer w10: U2.13 3370.01,3536.46 3450.55,3617 3762.6,3617 3942,3796.4 U3.1@3942,3826.01
NetU4_3: U4.3 U5.8 | length 421.1
  Top Layer w10: U4.3 4276.01,3842 4331.01,3897 4520,3897 4548,3869 U5.8@4548,3836.01
NetU4_4: U4.4 U5.7 | length 536.1
  Top Layer w10: U4.4 4226.01,3844.01 4295,3913 4555,3913 4598,3870 U5.7@4598,3836.01
NetU4_5: U4.5 U5.6 | length 668.1
  Top Layer w10: U4.5 4176.01,3862 4243.01,3929 4603,3929 4648,3884 U5.6@4648,3836.01
NetU4_6: U4.6 U5.5 | length 769.5
  Top Layer w10: U4.6 4126.01,3852 4219.01,3945 4626.76,3945 4698,3873.76 U5.5@4698,3836.01
NetU4_10: U4.10 U5.4 | length 807.9
  Top Layer w10: U4.10 4176.01,3657 4199.01,3680 4668,3680 4748,3760 U5.4@4748,3836.01
NetU4_11: U4.11 U5.3 | length 810.7
  Top Layer w10: U4.11 4226.01,3662 4228.01,3664 4701.76,3664 4798,3760.24 U5.3@4798,3836.01
NetU4_12: U4.12 U5.2 | length 794.3
  Top Layer w10: U4.12 4276.01,3642 4282.01,3648 4708.39,3648 4848,3787.61 4848,3836.01 U5.2@4840,3828.01
NetU4_13: U4.13 U5.1 | length 745
  Top Layer w10: U4.13 4326.01,3596.01 4362,3632 4723.6,3632 4898,3806.4 U5.1@4898,3836.01
NetU6_3: U6.3 U7.8 | length 422.8
  Top Layer w10: U6.3 5466.01,3868.49 5523.01,3925.49 5708,3925.49 5738,3895.49 U7.8
NetU6_4: U6.4 U7.7 | length 537.8
  Top Layer w10: U6.4 5416.01,3870.5 5487,3941.49 5743,3941.49 5788,3896.49 U7.7
NetU6_5: U6.5 U7.6 | length 669.8
  Top Layer w10: U6.5 5366.01,3888.49 5435.01,3957.49 5791,3957.49 5838,3910.49 U7.6
NetU6_6: U6.6 U7.5 | length 771.2
  Top Layer w10: U6.6 5316.01,3878.49 5411.01,3973.49 5814.76,3973.49 5888,3900.25 U7.5
NetU6_10: U6.10 U7.4 | length 807.9
  Top Layer w10: U6.10 5366.01,3683.49 5392.52,3710 5861.51,3710 5938,3786.49 U7.4
NetU6_11: U6.11 U7.3 | length 810.7
  Top Layer w10: U6.11 5416.01,3688.49 5421.52,3694 5895.27,3694 5988,3786.73 U7.3
NetU6_12: U6.12 U7.2 | length 794.3
  Top Layer w10: U6.12 5466.01,3668.49 5475.52,3678 5901.9,3678 6038,3814.1 U7.2 U7.2@6030,3854.5
NetU6_13: U6.13 U7.1 | length 766.7
  Top Layer w10: U6.13 5516.01,3659.5 5518.51,3662 5917.11,3662 6088,3832.89 U7.1
VCC: Q1.2 Q2.2 Q3.2 Q4.2 Q5.2 Q6.2 Q7.2 Q8.2 Q9.2 Q10.2 Q11.2 U1.16 U2.9 U2.14 U4.9 U4.14 U6.9 U6.14 U8.16 | length 6438.1
  Top Layer w10: U2.9 3170.01,3507.47 3194.15,3483.33 3380.27,3483.33 3420.01,3523.07 U2.14 3485.24,3595 4120,3595 4126.01,3588.99 U4.9 4126.01,3508.99 4150,3485 4355,3485 4376.01,3506.01 U4.14 4417.24,3581 5202.99,3581 5255,3633.01 5296.99,3633.01 5316.01,3613.99 U6.9 5316.01,3526.99 5338,3505 5537,3505 5566.01,3534.01 U6.14
  Top Layer w20: v1(1946.62,3180) Q11.2 ; v1(2096.62,3180) Q10.2 ; v1(2246.62,3180) Q9.2 ; v1(2396.62,3180) Q8.2 ; U8.16 v1(2546.62,3529.76) ; v1(2546.62,3180) Q7.2 ; v1(2696.62,3180) Q6.2 ; v1(2846.62,3180) Q5.2 ; U1.16 v1(3006.62,3526.76) ; v1(2996.62,3180) Q4.2 ; v1(3146.62,3180) Q3.2 ; v1(3296.62,3180) Q2.2 ; U2.14 v1(3462.63,3529.76) ; v1(3446.62,3180) Q1.2
  Bottom Layer w20: v1(1946.62,3180) v1(2096.62,3180) v1(2246.62,3180) v1(2396.62,3180) v1(2546.62,3180) ; v1(2546.62,3529.76) v1(2546.62,3180) ; v1(3006.62,3526.76) 3006.62,3243.38 3070,3180 ; v1(3462.63,3529.76) 3462.63,3217.37 3500,3180 ; 3570,3180 3500,3180 ; v1(2546.62,3180) v1(2696.62,3180) v1(2846.62,3180) v1(2996.62,3180) 3070,3180 ; 3070,3180 v1(3146.62,3180) v1(3296.62,3180) v1(3446.62,3180) 3500,3180
pads on no net: U1.7 U3.10 U5.10 U7.10 U8.7 U8.9 U8.10 U8.11

## Silkscreen, mask and mechanical layers (free items; w line width, h text height)
Top Paste:
  lines w19.68: 6407.02,1598 6719.78,1598 ; 6407.02,1637 6719.78,1637 ; 6407.02,1676 6719.78,1676 ; 6407.02,1715 6719.78,1715 ; 6407.02,1754 6719.78,1754 ; 6407.02,1793 6719.78,1793 ; 6407.02,1832 6719.78,1832 ; 6407.02,1871 6719.78,1871 ; 6407.02,1910 6719.78,1910 ; 6407.02,1949 6719.78,1949 ; 6407.02,1988 6719.78,1988 ; 6407.02,2027 6719.78,2027 ; 6407.02,2066 6719.78,2066 ; 6407.02,2105 6719.78,2105 ; 6407.02,2144 6719.78,2144 ; 6407.02,2181.49 6719.78,2181.49 ; 6407.02,2222 6719.78,2222 ; 6407.02,2261 6719.78,2261 ; 6407.02,2301 6719.78,2301 ; 6407.02,2339 6719.78,2339 ; 6407.02,2378 6719.78,2378 ; 6407.02,2417 6719.78,2417 ; 6407.02,2456 6719.78,2456 ; 6407.02,2495 6719.78,2495
Bottom Paste:
  lines w10: 2102.45,1637 2415.21,1637 ; 2102.45,1676 2415.21,1676 ; 2102.45,1715 2415.21,1715 ; 2102.45,1754 2415.21,1754 ; 2102.45,1793 2415.21,1793 ; 2102.45,1910 2415.21,1910 ; 2102.45,1949 2415.21,1949 ; 2102.45,1988 2415.21,1988 ; 2102.45,2027 2415.21,2027 ; 2102.45,2066 2415.21,2066 ; 2102.45,2105 2415.21,2105 ; 2102.45,2144 2415.21,2144 ; 2102.45,2183 2415.21,2183 ; 2102.45,2222 2415.21,2222 ; 2102.45,2261 2415.21,2261 ; 2102.45,2300 2415.21,2300 ; 2102.45,2378 2415.21,2378 ; 2102.45,2456 2415.21,2456 ; 6398.25,2683 6711,2683 ; 6398.25,2722 6711,2722 ; 6398.25,2761 6711,2761 ; 6398.25,2800 6711,2800 ; 6398.25,2839 6711,2839 ; 6398.25,2956 6711,2956 ; 6398.25,2995 6711,2995 ; 6398.25,3034 6711,3034 ; 6398.25,3073 6711,3073 ; 6398.25,3112 6711,3112 ; 6398.25,3151 6711,3151 ; 6398.25,3190 6711,3190 ; 6398.25,3229 6711,3229 ; 6398.25,3268 6711,3268 ; 6398.25,3307 6711,3307 ; 6398.25,3346 6711,3346 ; 6398.25,3424 6711,3424 ; 6398.25,3502 6711,3502
  lines w19.68: 2102.45,1598 2415.21,1598 ; 2102.45,1637 2415.21,1637 ; 2102.45,1676 2415.21,1676 ; 2102.45,1715 2415.21,1715 ; 2102.45,1754 2415.21,1754 ; 2102.45,1793 2415.21,1793 ; 2102.45,1832 2415.21,1832 ; 2102.45,1871 2415.21,1871 ; 2102.45,1910 2415.21,1910 ; 2102.45,1949 2415.21,1949 ; 2102.45,1988 2415.21,1988 ; 2102.45,2027 2415.21,2027 ; 2102.45,2066 2415.21,2066 ; 2102.45,2105 2415.21,2105 ; 2102.45,2144 2415.21,2144 ; 2102.45,2183 2415.21,2183 ; 2102.45,2222 2415.21,2222 ; 2102.45,2261 2415.21,2261 ; 2102.45,2300 2415.21,2300 ; 2102.45,2339 2415.21,2339 ; 2102.45,2378 2415.21,2378 ; 2102.45,2417 2415.21,2417 ; 2102.45,2456 2415.21,2456 ; 2102.45,2495 2415.21,2495 ; 6398.25,2644 6711,2644 ; 6398.25,2683 6711,2683 ; 6398.25,2722 6711,2722 ; 6398.25,2761 6711,2761 ; 6398.25,2800 6711,2800 ; 6398.25,2839 6711,2839 ; 6398.25,2878 6711,2878 ; 6398.25,2917 6711,2917 ; 6398.25,2956 6711,2956 ; 6398.25,2995 6711,2995 ; 6398.25,3034 6711,3034 ; 6398.25,3073 6711,3073 ; 6398.25,3112 6711,3112 ; 6398.25,3151 6711,3151 ; 6398.25,3190 6711,3190 ; 6398.25,3229 6711,3229 ; 6398.25,3268 6711,3268 ; 6398.25,3307 6711,3307 ; 6398.25,3346 6711,3346 ; 6398.25,3385 6711,3385 ; 6398.25,3424 6711,3424 ; 6398.25,3463 6711,3463 ; 6398.25,3502 6711,3502 ; 6398.25,3541 6711,3541
Top Solder:
  lines w19.68: 6407.02,1598 6719.78,1598 ; 6407.02,1637 6719.78,1637 ; 6407.02,1676 6719.78,1676 ; 6407.02,1715 6719.78,1715 ; 6407.02,1754 6719.78,1754 ; 6407.02,1793 6719.78,1793 ; 6407.02,1832 6719.78,1832 ; 6407.02,1871 6719.78,1871 ; 6407.02,1910 6719.78,1910 ; 6407.02,1949 6719.78,1949 ; 6407.02,1988 6719.78,1988 ; 6407.02,2027 6719.78,2027 ; 6407.02,2066 6719.78,2066 ; 6407.02,2105 6719.78,2105 ; 6407.02,2144 6719.78,2144 ; 6407.02,2181.49 6719.78,2181.49 ; 6407.02,2222 6719.78,2222 ; 6407.02,2261 6719.78,2261 ; 6407.02,2301 6719.78,2301 ; 6407.02,2339 6719.78,2339 ; 6407.02,2378 6719.78,2378 ; 6407.02,2417 6719.78,2417 ; 6407.02,2456 6719.78,2456 ; 6407.02,2495 6719.78,2495
Bottom Solder:
  lines w10: 2102.45,1637 2415.21,1637 ; 2102.45,1676 2415.21,1676 ; 2102.45,1715 2415.21,1715 ; 2102.45,1754 2415.21,1754 ; 2102.45,1793 2415.21,1793 ; 2102.45,1910 2415.21,1910 ; 2102.45,1949 2415.21,1949 ; 2102.45,1988 2415.21,1988 ; 2102.45,2027 2415.21,2027 ; 2102.45,2066 2415.21,2066 ; 2102.45,2105 2415.21,2105 ; 2102.45,2144 2415.21,2144 ; 2102.45,2183 2415.21,2183 ; 2102.45,2222 2415.21,2222 ; 2102.45,2261 2415.21,2261 ; 2102.45,2300 2415.21,2300 ; 2102.45,2378 2415.21,2378 ; 2102.45,2456 2415.21,2456 ; 6398.25,2683 6711,2683 ; 6398.25,2722 6711,2722 ; 6398.25,2761 6711,2761 ; 6398.25,2800 6711,2800 ; 6398.25,2839 6711,2839 ; 6398.25,2956 6711,2956 ; 6398.25,2995 6711,2995 ; 6398.25,3034 6711,3034 ; 6398.25,3073 6711,3073 ; 6398.25,3112 6711,3112 ; 6398.25,3151 6711,3151 ; 6398.25,3190 6711,3190 ; 6398.25,3229 6711,3229 ; 6398.25,3268 6711,3268 ; 6398.25,3307 6711,3307 ; 6398.25,3346 6711,3346 ; 6398.25,3424 6711,3424 ; 6398.25,3502 6711,3502
  lines w19.68: 2102.45,1598 2415.21,1598 ; 2102.45,1637 2415.21,1637 ; 2102.45,1676 2415.21,1676 ; 2102.45,1715 2415.21,1715 ; 2102.45,1754 2415.21,1754 ; 2102.45,1793 2415.21,1793 ; 2102.45,1832 2415.21,1832 ; 2102.45,1871 2415.21,1871 ; 2102.45,1910 2415.21,1910 ; 2102.45,1949 2415.21,1949 ; 2102.45,1988 2415.21,1988 ; 2102.45,2027 2415.21,2027 ; 2102.45,2066 2415.21,2066 ; 2102.45,2105 2415.21,2105 ; 2102.45,2144 2415.21,2144 ; 2102.45,2183 2415.21,2183 ; 2102.45,2222 2415.21,2222 ; 2102.45,2261 2415.21,2261 ; 2102.45,2300 2415.21,2300 ; 2102.45,2339 2415.21,2339 ; 2102.45,2378 2415.21,2378 ; 2102.45,2417 2415.21,2417 ; 2102.45,2456 2415.21,2456 ; 2102.45,2495 2415.21,2495 ; 6398.25,2644 6711,2644 ; 6398.25,2683 6711,2683 ; 6398.25,2722 6711,2722 ; 6398.25,2761 6711,2761 ; 6398.25,2800 6711,2800 ; 6398.25,2839 6711,2839 ; 6398.25,2878 6711,2878 ; 6398.25,2917 6711,2917 ; 6398.25,2956 6711,2956 ; 6398.25,2995 6711,2995 ; 6398.25,3034 6711,3034 ; 6398.25,3073 6711,3073 ; 6398.25,3112 6711,3112 ; 6398.25,3151 6711,3151 ; 6398.25,3190 6711,3190 ; 6398.25,3229 6711,3229 ; 6398.25,3268 6711,3268 ; 6398.25,3307 6711,3307 ; 6398.25,3346 6711,3346 ; 6398.25,3385 6711,3385 ; 6398.25,3424 6711,3424 ; 6398.25,3463 6711,3463 ; 6398.25,3502 6711,3502 ; 6398.25,3541 6711,3541